# EAGLE board CHRMN-PROT-SHIELD (EAGLE 7.3.0)
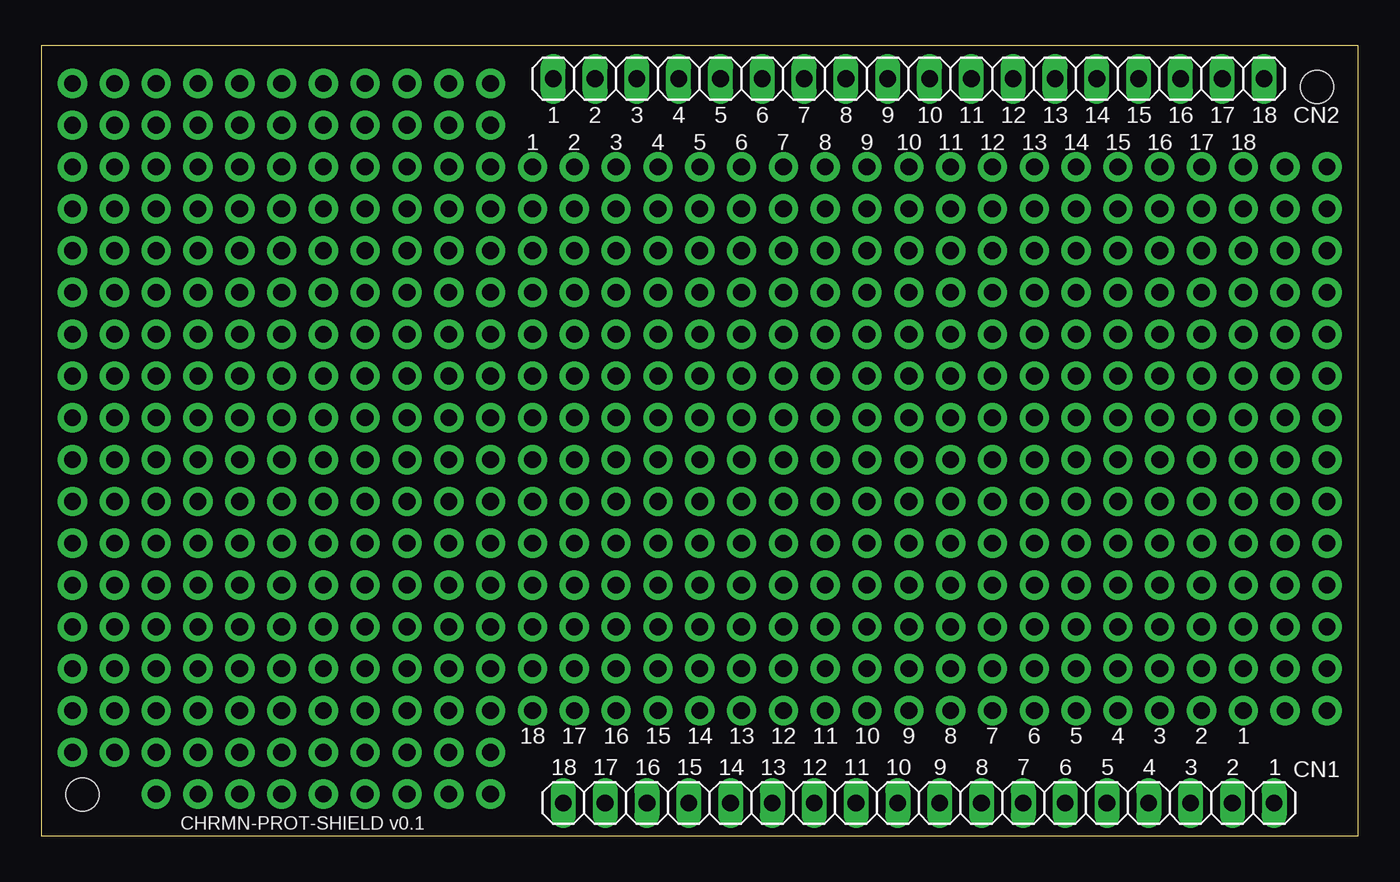
[diagram p0: board, top side]
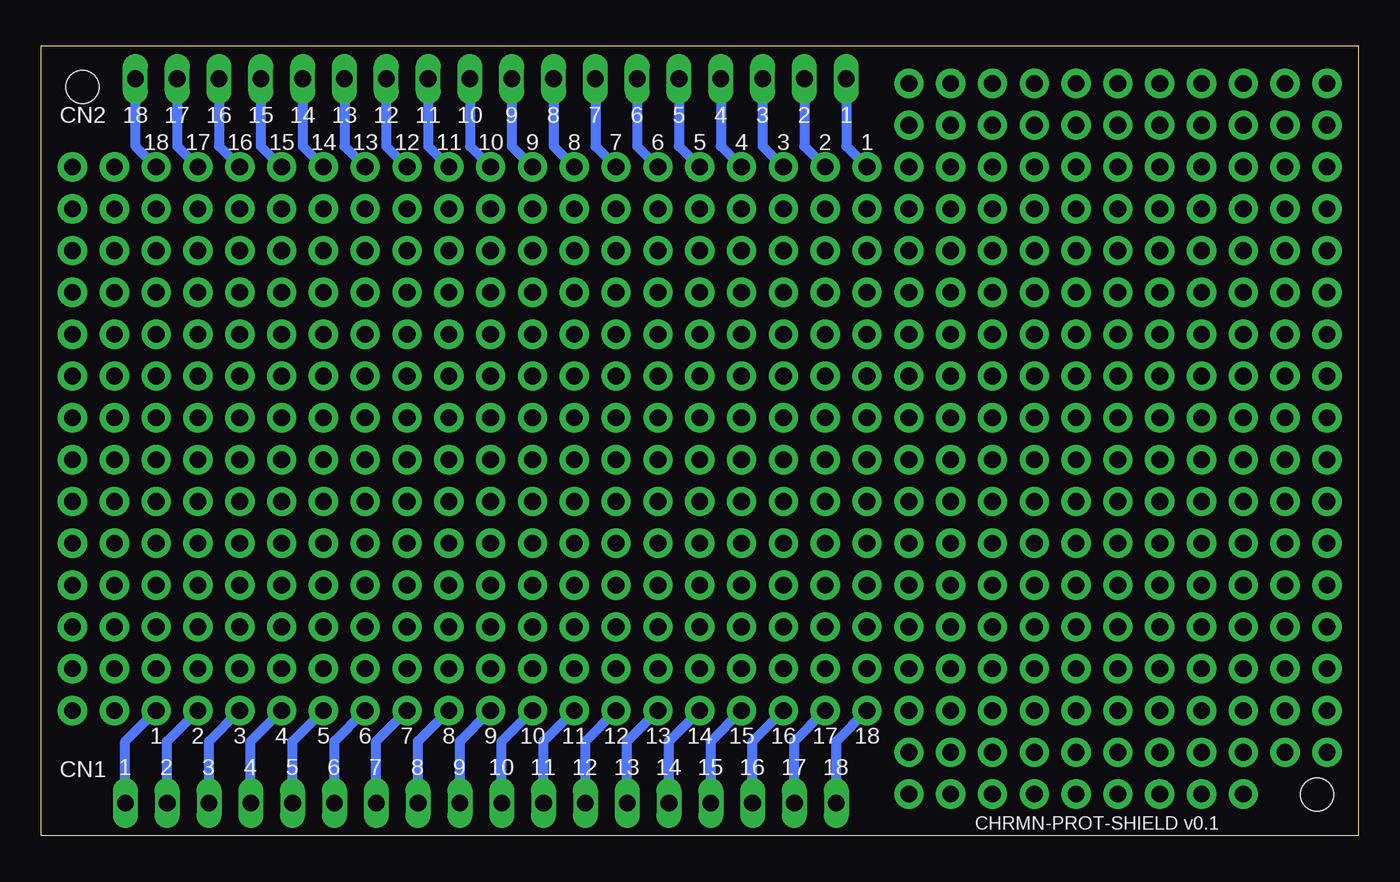
[diagram p1: board, bottom side, seen from below]

Size 80.01 x 48.01 mm. Coordinates in mm from the lower left corner, seen from the top.
Outline: 0,48.01 0,0 80,0 80.01,48.01 0,48.01
Copper layers (1*16): Top 0.035mm / dielectric 1.5mm / Bottom 0.035mm
Design rules "default": minimum track width 10mil, minimum drill 24mil, track to track 8mil, track to pad 8mil, pad to pad 8mil, via to via 8mil, smd to smd 8mil, copper to edge 40mil, drill to drill 8mil, minimum pad ring 10mil, minimum via ring 8mil, stop-mask expansion 4mil, vias tented up to drill 0mil, thermal gap 10mil
Net classes: 0 default: width 0.61 mm, drill 0.203 mm, clearance 0.203 mm
Holes 2 mm at 77.5,45.5 2.5,2.5

## Footprints (pad centres in the part's own frame; a part is rotated, then mirrored left to right if it is on the bottom)
1X18 = drill 1.016 long: 1 -21.59,0; 2 -19.05,0; 3 -16.51,0; 4 -13.97,0; 5 -11.43,0; 6 -8.89,0; 7 -6.35,0; 8 -3.81,0; 9 -1.27,0; 10 1.27,0; 11 3.81,0; 12 6.35,0; 13 8.89,0; 14 11.43,0; 15 13.97,0; 16 16.51,0; 17 19.05,0; 18 21.59,0
N-PHEAD-1_14 = drill 1.016 pad 1.778: 1 -16.51,0; 2 -13.97,0; 3 -11.43,0; 4 -8.89,0; 5 -6.35,0; 6 -3.81,0; 7 -1.27,0; 8 1.27,0; 9 3.81,0; 10 6.35,0; 11 8.89,0; 12 11.43,0; 13 13.97,0; 14 16.51,0
N-PHEAD-1_18 = drill 1.016 pad 1.778: 1 -16.51,0; 2 -13.97,0; 3 -11.43,0; 4 -8.89,0; 5 -6.35,0; 6 -3.81,0; 7 -1.27,0; 8 1.27,0; 9 3.81,0; 10 6.35,0; 11 8.89,0; 12 11.43,0; 13 13.97,0; 14 16.51,0; 15 -19.05,0; 16 -21.59,0; 17 19.05,0; 18 21.59,0
N-PHEAD-1_17 = drill 1.016 pad 1.778: 1 -15.24,0; 2 -12.7,0; 3 -10.16,0; 4 -7.62,0; 5 -5.08,0; 6 -2.54,0; 7 0,0; 8 2.54,0; 9 5.08,0; 10 7.62,0; 11 10.16,0; 12 12.7,0; 13 15.24,0; 14 17.78,0; 15 -17.78,0; 16 -20.32,0; 17 20.32,0

## Placement (x,y rotation side)
CN1  [1X18]  53.3,2 180 top
CN2  [1X18]  52.7,46 0 top
JP1  [N-PHEAD-1_14]  78.11,24.13 90 top
JP2  [N-PHEAD-1_14]  75.56,24.13 90 top
JP3  [N-PHEAD-1_14]  73.03,24.13 90 top
JP4  [N-PHEAD-1_14]  70.48,24.13 90 top
JP5  [N-PHEAD-1_14]  67.94,24.13 90 top
JP6  [N-PHEAD-1_14]  65.41,24.13 90 top
JP7  [N-PHEAD-1_14]  62.87,24.13 90 top
JP8  [N-PHEAD-1_14]  60.33,24.13 90 top
JP9  [N-PHEAD-1_14]  57.78,24.13 90 top
JP10  [N-PHEAD-1_14]  55.24,24.13 90 top
JP11  [N-PHEAD-1_14]  52.7,24.13 90 top
JP12  [N-PHEAD-1_14]  50.16,24.13 90 top
JP13  [N-PHEAD-1_14]  47.62,24.13 90 top
JP14  [N-PHEAD-1_14]  45.09,24.13 90 top
JP15  [N-PHEAD-1_14]  42.55,24.13 90 top
JP16  [N-PHEAD-1_14]  40.01,24.13 90 top
JP17  [N-PHEAD-1_14]  37.47,24.13 90 top
JP18  [N-PHEAD-1_14]  34.92,24.13 90 top
JP19  [N-PHEAD-1_14]  32.38,24.13 90 top
JP20  [N-PHEAD-1_14]  29.84,24.13 90 top
JP21  [N-PHEAD-1_18]  27.3,24.13 90 top
JP22  [N-PHEAD-1_18]  24.77,24.13 90 top
JP23  [N-PHEAD-1_18]  22.23,24.13 90 top
JP24  [N-PHEAD-1_18]  19.68,24.13 90 top
JP25  [N-PHEAD-1_18]  17.14,24.13 90 top
JP26  [N-PHEAD-1_18]  14.61,24.13 90 top
JP27  [N-PHEAD-1_18]  12.06,24.13 90 top
JP28  [N-PHEAD-1_18]  9.53,24.13 90 top
JP29  [N-PHEAD-1_18]  6.99,24.13 90 top
JP30  [N-PHEAD-1_17]  4.45,25.4 90 top
JP31  [N-PHEAD-1_17]  1.91,25.4 90 top

## Library data of the parts
CN1 CN2 = pinhead
JP1-JP31 = 0my

## Nets
N$1: CN2.18 JP3.14
N$2: CN2.17 JP4.14
N$3: CN2.16 JP5.14
N$4: CN2.15 JP6.14
N$5: CN2.14 JP7.14
N$6: CN2.13 JP8.14
N$7: CN2.12 JP9.14
N$8: CN2.11 JP10.14
N$9: CN2.10 JP11.14
N$10: CN2.9 JP12.14
N$11: CN2.8 JP13.14
N$12: CN2.7 JP14.14
N$13: CN2.6 JP15.14
N$14: CN2.5 JP16.14
N$15: CN2.4 JP17.14
N$16: CN2.3 JP18.14
N$17: CN2.2 JP19.14
N$18: CN2.1 JP20.14
N$19: CN1.1 JP3.1
N$20: CN1.2 JP4.1
N$21: CN1.3 JP5.1
N$22: CN1.4 JP6.1
N$23: CN1.5 JP7.1
N$24: CN1.6 JP8.1
N$25: CN1.7 JP9.1
N$26: CN1.8 JP10.1
N$27: CN1.9 JP11.1
N$28: CN1.10 JP12.1
N$29: CN1.11 JP13.1
N$30: CN1.12 JP14.1
N$31: CN1.13 JP15.1
N$32: CN1.14 JP16.1
N$33: CN1.15 JP17.1
N$34: CN1.16 JP18.1
N$35: CN1.17 JP19.1
N$36: CN1.18 JP20.1

## Tracks (layer width: path | path; a pad name or v marks a point on that pad's centre or on a via)
N$1
  Bottom 0.61: CN2.18 74.28,43.19 74.3,43.18 74.3,41.91 JP3.14
N$2
  Bottom 0.61: CN2.17 71.75,41.9 JP4.14
N$3
  Bottom 0.61: CN2.16 69.2,41.9 JP5.14
N$4
  Bottom 0.61: CN2.15 66.67,41.9 JP6.14
N$5
  Bottom 0.61: CN2.14 64.12,41.9 JP7.14
N$6
  Bottom 0.61: CN2.13 61.59,41.9 JP8.14
N$7
  Bottom 0.61: CN2.12 59.05,41.9 JP9.14
N$8
  Bottom 0.61: CN2.11 56.51,41.9 JP10.14
N$9
  Bottom 0.61: CN2.10 53.97,41.9 JP11.14
N$10
  Bottom 0.61: CN2.9 51.42,41.9 JP12.14
N$11
  Bottom 0.61: CN2.8 48.88,41.9 JP13.14
N$12
  Bottom 0.61: CN2.7 46.34,41.9 JP14.14
N$13
  Bottom 0.61: CN2.6 43.8,41.9 JP15.14
N$14
  Bottom 0.61: CN2.5 41.27,41.9 JP16.14
N$15
  Bottom 0.61: CN2.4 38.73,41.9 JP17.14
N$16
  Bottom 0.61: CN2.3 36.19,41.9 JP18.14
N$17
  Bottom 0.61: CN2.2 33.65,41.9 JP19.14
N$18
  Bottom 0.61: CN2.1 31.11,41.9 JP20.14
N$19
  Bottom 0.61: CN1.1 74.89,5.75 JP3.1
N$20
  Bottom 0.61: CN1.2 72.36,5.75 JP4.1
N$21
  Bottom 0.61: CN1.3 69.81,5.75 JP5.1
N$22
  Bottom 0.61: CN1.4 67.28,5.75 JP6.1
N$23
  Bottom 0.61: CN1.5 64.73,5.75 JP7.1
N$24
  Bottom 0.61: CN1.6 62.2,5.75 JP8.1
N$25
  Bottom 0.61: CN1.7 59.66,5.75 JP9.1
N$26
  Bottom 0.61: CN1.8 57.12,5.75 JP10.1
N$27
  Bottom 0.61: CN1.9 54.58,5.75 JP11.1
N$28
  Bottom 0.61: CN1.10 52.03,5.75 JP12.1
N$29
  Bottom 0.61: CN1.11 49.49,5.75 JP13.1
N$30
  Bottom 0.61: CN1.12 46.95,5.75 JP14.1
N$31
  Bottom 0.61: CN1.13 44.41,5.75 JP15.1
N$32
  Bottom 0.61: CN1.14 41.88,5.75 JP16.1
N$33
  Bottom 0.61: CN1.15 39.34,5.75 JP17.1
N$34
  Bottom 0.61: CN1.16 36.8,5.75 JP18.1
N$35
  Bottom 0.61: CN1.17 34.26,5.75 JP19.1
N$36
  Bottom 0.61: CN1.18 31.71,5.75 JP20.1

## Text on the board
tNames: 1 | 2 | 3 | 4 | 5 | 6 | 7 | 8 | 9 | 10 | 11 | 12 | 13 | 14 | 15 | 16 | 17 | 18 | CN2 | 1 | 2 | 3 | 4 | 5 | 6 | 7 | 8 | 9 | 10 | 11 | 12 | 13 | 14 | 15 | 16 | 17 | 18 | 18 | 17 | 16 | 15 | 14 | 13 | 12 | 11 | 10 | 9 | 8 | 7 | 6 | 5 | 4 | 3 | 2 | 1 | 18 | 17 | 16 | 15 | 14 | 13 | 12 | 11 | 10 | 9 | 8 | 7 | 6 | 5 | 4 | 3 | 2 | 1 | CN1 | CHRMN-PROT-SHIELD v0.1
bNames: 1 | 2 | 3 | 4 | 5 | 6 | 7 | 8 | 9 | 10 | 11 | 12 | 13 | 14 | 15 | 16 | 17 | 18 | CN2 | 1 | 2 | 3 | 4 | 5 | 6 | 7 | 8 | 9 | 10 | 11 | 12 | 13 | 14 | 15 | 16 | 17 | 18 | 18 | 17 | 16 | 15 | 14 | 13 | 12 | 11 | 10 | 9 | 8 | 7 | 6 | 5 | 4 | 3 | 2 | 1 | 18 | 17 | 16 | 15 | 14 | 13 | 12 | 11 | 10 | 9 | 8 | 7 | 6 | 5 | 4 | 3 | 2 | 1 | CN1 | CHRMN-PROT-SHIELD v0.1